# Altium PCB main.PcbDoc
Units mm, origin at the board's own origin, x right, y up, seen from the top; angles counter-clockwise.
Board outline 74.5 x 48.5 mm, 2 copper layers (Top Layer, Bottom Layer), stack 1.135 mm thick; 13 components, 9 nets, 45 pads, 0 vias.
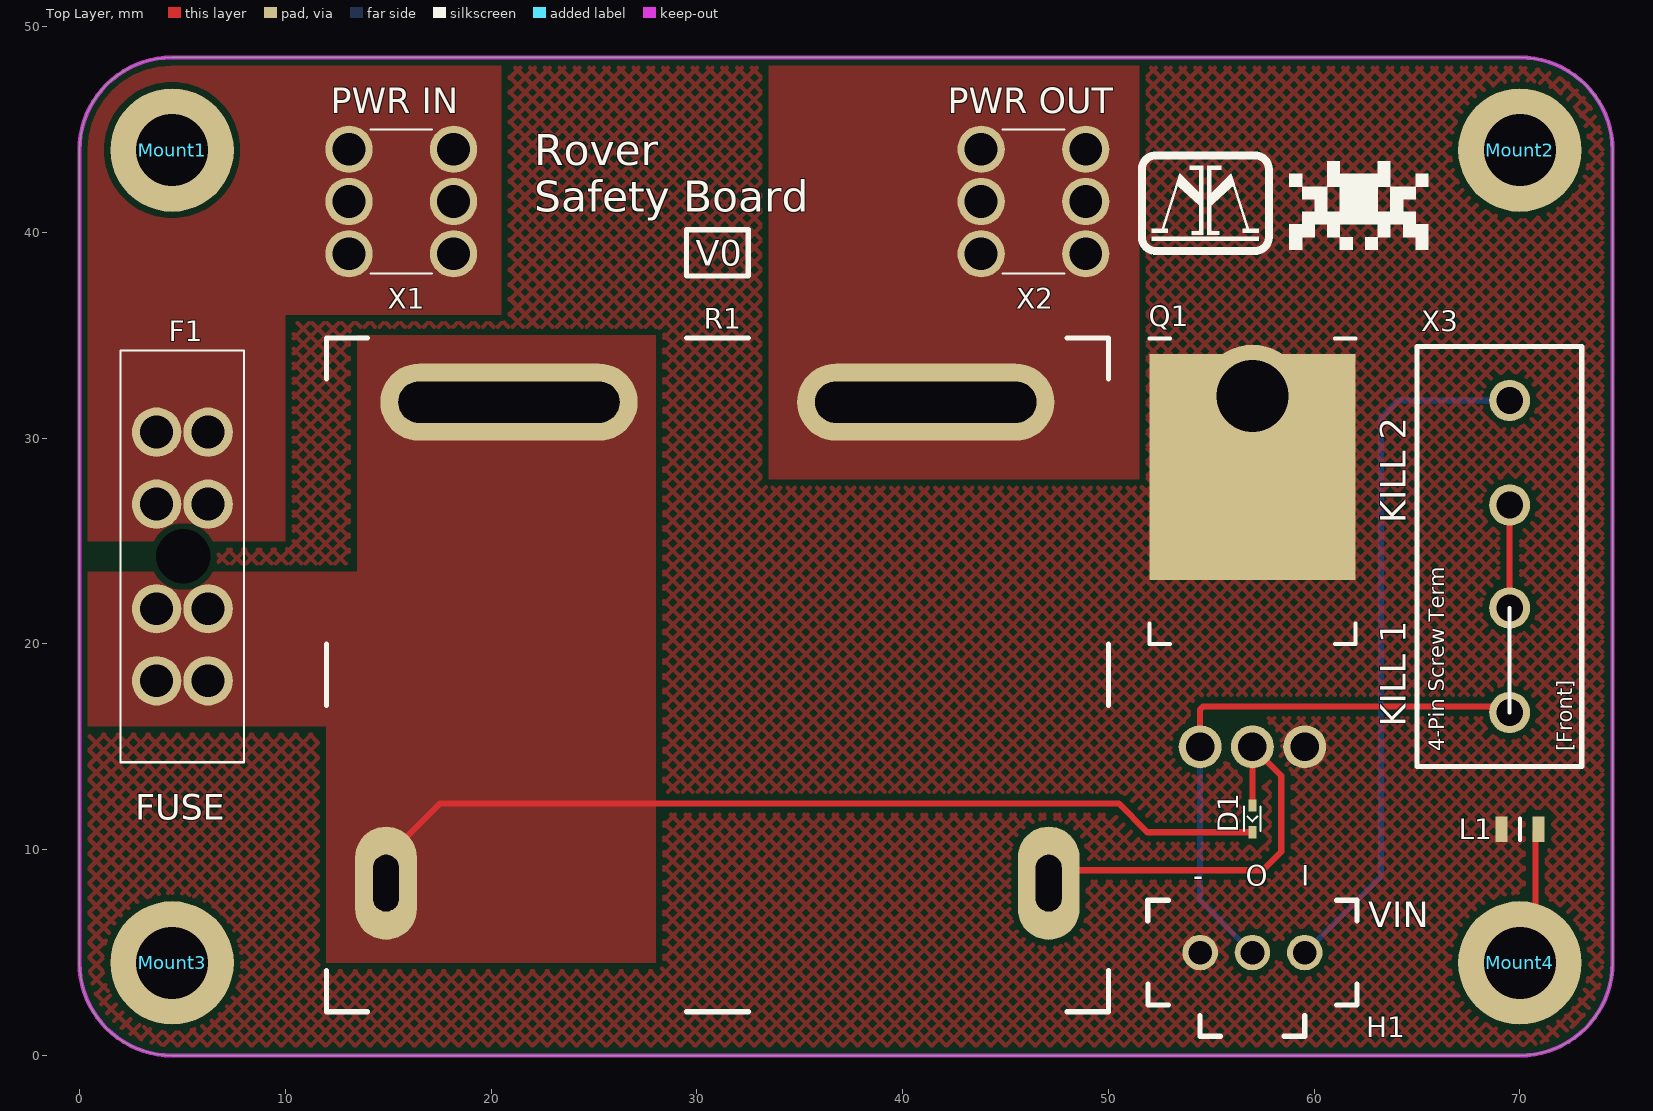
[diagram p0: Top Layer view]
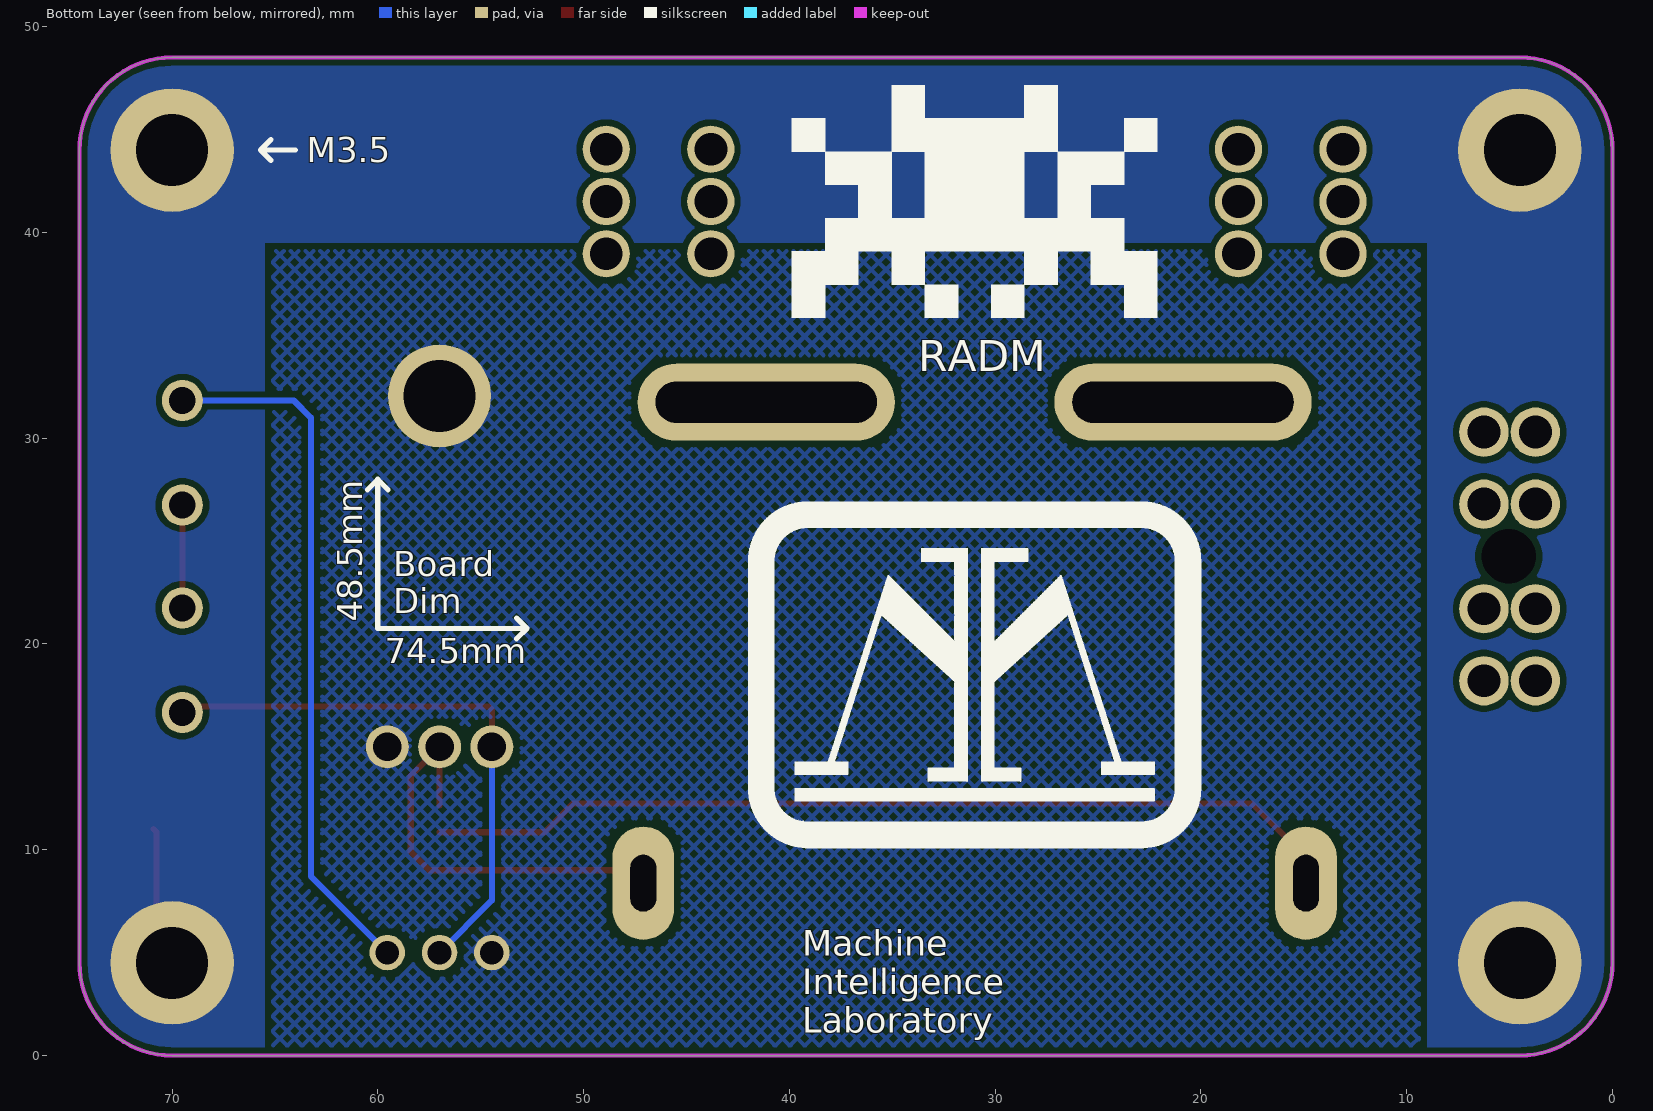
[diagram p1: Bottom Layer view, seen from below]

## Layer stack, top to bottom
Top Solder: solder mask 0.0102, Solder Resist, Dk 3.8
Top Layer: signal copper 0.035
Dielectric 1: dielectric 1.065, FR-4, Dk 4.8
Bottom Layer: signal copper 0.035
Bottom Solder: solder mask 0.0102, Solder Resist, Dk 3.8

## Board outline
4.5,0 cw(c4.5,4.5) 0,4.5 0,44 cw(c4.5,44) 4.5,48.5 70,48.5 cw(c70,44) 74.5,44 74.5,4.5 cw(c70,4.5) 70,0

## Design rules (kind name [scope] priority, off if disabled: settings)
BoardOutlineClearance [All] p1: gap=0.2 ignorepadtopadclearanceinfootprint=FALSE
Clearance "inPolygon Clearance" [InPolygon] p1: gap=0.3 ignorepadtopadclearanceinfootprint=TRUE // this rule ensures that every net within a polygon of a different net has a set clearance from the poly
Clearance "Different Diff Pair" [All] p2: gap=0.2 ignorepadtopadclearanceinfootprint=TRUE
Clearance "Same Diff Pair" [All] p3: gap=0.1 ignorepadtopadclearanceinfootprint=TRUE
Clearance "Different Nets" [not InAnyDifferentialPair] p4: gap=0.3 ignorepadtopadclearanceinfootprint=TRUE except(0.1: Arc-SMDPad Arc-THPad Arc-Via Arc-Text Track-SMDPad Track-THPad Track-Via Track-Text SMDPad-Text THPad-Text Via-Text Fill-Text Poly-Text Region-Text Text-Text; 0.12: Arc-Arc Arc-Track Track-Track; 0.15: SMDPad-SMDPad SMDPad-THPad SMDPad-Via THPad-THPad THPad-Via Via-Via; 0.2: Arc-Hole Track-Hole SMDPad-Hole THPad-Hole Via-Hole Fill-Hole Poly-Hole Region-Hole Text-Hole)
Clearance "Same Net" [not InAnyDifferentialPair] p5: gap=0 ignorepadtopadclearanceinfootprint=TRUE except(0.1: THPad-Via; 0.18: Arc-Arc Arc-Track Track-Track)
ComponentClearance [All] p1: gap=0.102 collisioncheckmode=3 verticalgap=0.102 showdistances=TRUE
DiffPairsRouting "Ethernet Routing" [InDifferentialPairClass('Ethernet_Pairs')] p1: maxlimit=0.2 minlimit=0.2 mostfreqgap=0.2 toplayer_minwidth=0.25 toplayer_maxwidth=0.25 toplayer_prefwidth=0.25 bottomlayer_minwidth=0.25 bottomlayer_maxwidth=0.25 bottomlayer_prefwidth=0.25 impedanceprofiledriven=TRUE maxuncoupledlength=12.7
DiffPairsRouting "USB Routing" [InDifferentialPairClass('USB_Pairs')] p2: maxlimit=0.127 minlimit=0.127 mostfreqgap=0.127 toplayer_minwidth=0.23 toplayer_maxwidth=0.23 toplayer_prefwidth=0.23 bottomlayer_minwidth=0.23 bottomlayer_maxwidth=0.23 bottomlayer_prefwidth=0.23 impedanceprofiledriven=TRUE maxuncoupledlength=12.7
DiffPairsRouting "CAN Routing" [InDifferentialPairClass('CAN_Pairs')] p3: maxlimit=0.5 minlimit=0.5 mostfreqgap=0.5 toplayer_minwidth=0.201 toplayer_maxwidth=0.201 toplayer_prefwidth=0.201 bottomlayer_minwidth=0.201 bottomlayer_maxwidth=0.201 bottomlayer_prefwidth=0.201 impedanceprofiledriven=TRUE maxuncoupledlength=12.7
Height [All] p1: minheight=0 maxheight=1816.048 prefheight=12.7
HoleSize [All] p1: absolutevalues=TRUE maxlimit=6.3 minlimit=0.3 maxpercent=80.000 minpercent=20.000
HoleToHoleClearance [All] p1: gap=0.25 allowstackedmicrovias=FALSE
Length [All] p1: maxlimit=43.432 minlimit=0 usedelayunits=TRUE mindelay=0.000000 maxdelay=10000.000000
MatchedLengths "Diff Pair Matched Delays" [InDifferentialPairClass('Ethernet_Pairs') or InDifferentialPairClass('USB_Pairs') or InDifferentialPairClass('CAN_Pairs')] p1: tolerance=5 checknetsindiffpair=TRUE checkdiffpairvsdiffpair=FALSE checkxsignals=FALSE checkothers=FALSE usedelayunits=TRUE delaytolerance=100.000000
MinimumAnnularRing [All] p1: minimumring=0.2
MinimumSolderMaskSliver [All] p1: minsoldermaskwidth=0
PlaneClearance "Supply Net Clearance" [InNetClass('Supply_Nets')] p1: clearance=0.5
PlaneClearance "All Nets" [All] p2: clearance=0.3
PolygonConnect "Supply Nets" [InNetClass('Supply_Nets')] p1: connectstyle=Direct reliefconductorwidth=0.3 reliefentries=4 polygonreliefangle="90 Angle" airgapwidth=0.254
PolygonConnect General [All] p2: connectstyle=Relief reliefconductorwidth=0.254 reliefentries=4 polygonreliefangle="90 Angle" airgapwidth=0.254
RoutingVias [All] p1: holewidth=0.2 width=0.35 viastyle="Through Hole" minholewidth=0.15 minwidth=0.3 maxholewidth=6.3 maxwidth=6.55
SilkToSilkClearance [All] p1: silktosilkclearance=0
SilkToSolderMaskClearance [All] p1: minsilkscreentomaskgap=0 clearancetoexposedcopper=TRUE
SolderMaskExpansion [All] p1: expansion=0.075 istentingtop=FALSE
SupplyNets "Schematic Supply Nets_3" [InNet('GND')] p1: voltage=0.000
SupplyNets "Schematic Supply Nets_1" [InNet('Earth')] p2: voltage=0.000
UnRoutedNet [All] p1: checkbadconnections=TRUE
Width [All] p1: maxlimit=100 minlimit=0.1 preferedwidth=0.3
Width "nRF Width" [InNetClass('nRF Signal')] p2: maxlimit=0.379 minlimit=0.379 preferedwidth=0.379 minimp=50.000000 maximp=50.000000 favimp=50.000000 checkconnectedcopper=TRUE
20 further rules are at their usual default settings.

## Classes and differential pairs
net class Supply_Nets: Earth GND NetD1_1 NetF1_1 NetR1_4
component class Relay: D1 F1 H1 Q1 R1 X1 X2 X3
component class Overview: L1 Mount1 Mount2 Mount3 Mount4

## Components (designator, comment, footprint, x,y, rotation, side; value= is the part's Value field where it differs from the comment)
D1 "Rectifier" "[Diode] SMD SOD-523" 57,11.5 r270 top
F1 "Thru-Hole" "[Fuse] Blade (2)" 5,24.25 r270 top
H1 "1x3 Male" "[Header] Shrouded 1x3 Male" 57,5 r180 top
L1 "742792040" "[Ferrite] SMD Bead 0805 (2)" 70,11 r180 top
Mount1 "M3 Mount Hole" "[Mount] M3 Mount Hole"#1 4.826,43.307 r0 top
Mount2 "M3 Mount Hole" "[Mount] M3 Mount Hole"#2 70,44 r90 top
Mount3 "M3 Mount Hole" "[Mount] M3 Mount Hole"#3 4.5,6.477 r90 top
Mount4 "M3 Mount Hole" "[Mount] M3 Mount Hole"#4 64.079,3.7 r90 top
Q1 "[FET] NMOS IRF610PBF" "[FET] NMOS IRF610PBF" 57,15 r0 top
R1 "AZSR190-1A-24D" "[Relay] AZSR190-1A-24D" 31,18.5 r0 top
X1 "7461057" "[Port] Shank Connector (100A)" 15.64,41.5 r0 top
X2 "7461057" "[Port] Shank Connector (100A)" 46.36,41.5 r0 top
X3 "4pin Screw Terminal" "[Screw Terminal] 4pin 5mm" 69.5,24.25 r90 top

## Footprints (in the part's own frame and the unit in brackets; to place one, negate y for a bottom-side part, rotate by r counter-clockwise, add the part's x,y. Pads: shape width x height; smd on the part's side, far side on the other; paste and mask are expansions set on the pad)
"[Diode] SMD SOD-523" [mm]
  rect 0.6x0.4 smd: 1(0.65,0) 2(-0.65,0)
  silkscreen extent -0.6,-0.4 0.6,0.4, body extent -0.8,-0.4 0.8,0.4, height 0.63
"[Ferrite] SMD Bead 0805 (2)" [mm] "742792040"
  rect 0.6x1.25 smd: 1(-0.9,0) 2(0.9,0)
  silkscreen extent 0,-0.53 0,0.53, body extent -1,-0.6 1,0.6, height 1.1
"[FET] NMOS IRF610PBF" [mm]
  round 2.085 hole 1.39: D(0,0) G(-2.54,0) S(2.54,0)
  rect 10.02x11 smd: X(0,13.6)
  round 5 hole 3.5: X(0,17.05)
  silkscreen extent -5.01,5 5.01,19.85, body extent -5.01,-0.25 5.01,20, height 4.51
"[Fuse] Blade (2)" [mm]
  round 2.4 hole 1.6: 1(-6.04,-1.25) 1(-6.04,1.25) 1(-2.54,1.25) 1(-2.54,-1.25) 2(2.54,1.25) 2(2.54,-1.25) 2(6.04,-1.25) 2(6.04,1.25)
  round 1.325 hole 2.65 unplated: ""(0,0.045)
  silkscreen extent -10,-3 10,3, body extent -10,-3 10,3, height 18.03
"[Header] Shrouded 1x3 Male" [mm] "070543-0037 / Mates with 005057-9403"
  round 1.725 hole 1.15: 1(-2.54,0) 2(0,0) 3(2.54,0)
  silkscreen extent -5.08,-2.54 5.09,4.06, body extent -5.08,-2.54 5.08,4.06, height 11.67
"[Mount] M3 Mount Hole"#1 [mm] "Place at least 4.5mm from board edge. Plated."
  round 6 hole 3.5: 1(-0.326,0.693)
"[Mount] M3 Mount Hole"#2 [mm] "Place at least 4.5mm from board edge. Plated."
  round 6 hole 3.5: 1(0,0)
"[Mount] M3 Mount Hole"#3 [mm] "Place at least 4.5mm from board edge. Plated."
  round 6 hole 3.5: 1(-1.977,0)
"[Mount] M3 Mount Hole"#4 [mm] "Place at least 4.5mm from board edge. Plated."
  round 6 hole 3.5: 1(0.8,-5.921)
"[Port] Shank Connector (100A)" [mm]
  round 2.3 hole 1.6: 1(-2.54,-2.54) 1(-2.54,0) 1(-2.54,2.54) 1(2.54,-2.54) 1(2.54,0) 1(2.54,2.54)
  silkscreen extent -1.5,-3.5 1.5,3.5, body extent -3.5,-3.5 3.5,3.5, height 6
"[Relay] AZSR190-1A-24D" [mm] "AZSR190-1A-24D"
  oval 3x5.5 hole 1.25 slot 2.75 at 90 deg: 1(-16.1,-10.125) 2(16.1,-10.125)
  oval 12.5x3.75 hole 2 slot 10.75 at 0 deg: 3(-10.125,13.25) 4(10.125,13.25)
  silkscreen extent -19,-16.38 19,16.38, body extent -19,-16.38 19,16.38, height 40
"[Screw Terminal] 4pin 5mm" [mm]
  round 2 hole 1.3: 1(-7.58,0) 2(-2.5,0) 3(2.5,0) 4(7.58,0)
  silkscreen extent -10.2,-3.5 10.2,4.5, body extent -10.53,-3.5 10.09,4.1, height 9.99

## Part data
D1: library part "[Diode] SMD Rectifier", "Generic", Size Package=SOD-523, Supplier Part Number 1=1514-CMOD2004TRPBFREECT-ND, Supplier 1=DigiKey
F1: library part "[Fuse] Thru-Hole Blade", Capacity=20A
H1: library part "[Header] Shrouded 1x3 Male", "070543-0037 / Mates with 005057-9403", Supplier Part Number 1=WM4825-ND, Supplier 1=DigiKey, Supplier 2=DigiKey, Supplier Part Number 2=WM2901-ND
L1: library part "[Ferrite] SMD Ferrite Bead (2)", Supplier Part Number 1=732-1620-1-ND, Supplier 1=DigiKey
Mount1 Mount2 Mount3 Mount4: library part "[Mount] M3 Mount Hole", "Place at least 4.5mm from board edge. Plated."
Q1: "N-Channel 200 V 3.3A (Tc) 36W (Tc) Through Hole TO-220AB", Supplier Part Number 1=IRF610PBF-ND, Supplier 1=DigiKey
R1: library part "[Relay] AZSR190-1A-24D", Supplier Part Number 1=3385-AZSR190-1A-24D-ND, Supplier 1=DigiKey
X1 X2: library part "[Port] Shank Connector (100A)", "7461057, internal thread", Supplier Part Number 1=732-7461057-ND, Supplier 1=DigiKey
X3: library part "[Screw Terminal] 4pin", Supplier Part Number 1=102-6147-ND, Supplier 1=DigiKey

## Nets (pads, with @x,y where several pads share a name; then routed paths per layer and width w, separated by ;. In a path a pad name is that pad's centre, name@x,y a point inside that pad or via, vN(x,y) a via of type N, cw(c..) or ccw(c..) an arc to the next point about the centre after c; other vN are vias at no path point)
Earth: L1.1 Mount1.1 Mount2.1 Mount3.1 Mount4.1 | length 6.9
  Top Layer w0.3: Mount4.1 70.75,5.25 70.75,10.85 L1.1
GND: H1.3 L1.2 Q1.S Q1.X
NetD1_1: D1.1 F1.2 R1.1 R1.3 | length 45
  Top Layer w0.3: R1.1 14.9,9.625 17.525,12.25 50.5,12.25 51.9,10.85 D1.1
NetD1_2: D1.2 Q1.D R1.2 | length 20.5
  Top Layer w0.3: R1.2 47.725,9 57.5,9 58.405,9.905 58.405,13.595 Q1.D 57,12.845 D1.2
NetF1_1: F1.1 X1.1
NetR1_4: R1.4 X2.1
NetX3_2: X3.2 X3.3 | length 5
  Top Layer w0.3: X3.2 X3.3
"Relay Control IN": H1.1 X3.4 | length 34.1
  Bottom Layer w0.3: H1.1 63.25,8.71 63.25,31 64.08,31.83 X3.4
"Relay Control OUT": H1.2 Q1.G X3.1 | length 28.1
  Top Layer w0.3: Q1.G 54.46,16.819 54.601,16.96 69.21,16.96 X3.1
  Bottom Layer w0.3: Q1.G 54.46,7.54 H1.2
pads on no net: F1.

## Polygon pours and split planes (outlines as drawn)
GND on Top Layer "Top GND Poly" (hatched 45Degree grid 0.508 track 0.203, remove dead copper, pour order 5): 0,0 0,48.5 74.5,48.5 74.5,0
NetR1_4 on Top Layer "NONET_L01_P-001" (solid, pour order 2): 33.5,48.5 51.5,48.5 51.5,28 33.5,28
NetD1_1 on Top Layer "Power IN Fused" (solid, remove dead copper, pour order 1): 0,23.5 13.5,23.5 13.5,35 28,35 28,4.5 12,4.5 12,16 0,16
NetF1_1 on Top Layer "Power IN Unfused" (solid, remove dead copper, pour order 0): 0,25 10,25 10,36 20.5,36 20.5,48.5 0,48.5
GND on Bottom Layer "Bottom GND Poly" (hatched 45Degree grid 0.508 track 0.203, remove dead copper, pour order 4): 9,0.408 9,39.5 65.5,39.5 65.5,0.408
Earth on Bottom Layer "Earth Poly" (solid, remove dead copper, pour order 3): 0,0 9,0 9,39.5 65.5,39.5 65.5,0 74.5,0 74.5,48.5 0,48.5

## Keep-outs
Keep-Out Layer:
  the board outline again, w0.2

## Silkscreen, mask and mechanical layers (free items; w line width, h text height)
Top Overlay:
  drawing of 14 lines, arcs and shapes, not listed
  text "PWR IN" at 12.204,45.8 h1.25
  text "PWR OUT" at 42.195,45.8 h1.25
  text "Rover / Safety Board" at 22.103,41 h1.5
  text "V0" at 29.959,38.375 h1.25
  text "KILL 2" at 64.45,25.854 h1.25 r90
  text "KILL 1" at 64.45,15.982 h1.25 r90
  text "FUSE" at 2.709,11.45 h1.25
  text "-" at 54.127,8.25 h1
  text "O" at 56.667,8.25 h1
  text "I" at 59.373,8.25 h1
  text "VIN" at 62.635,6.24 h1.25
Bottom Overlay:
  drawing of 18 lines, arcs and shapes, not listed
  text "M3.5" at 63.45,43.4 h1.2
  text "RADM" at 33.749,33.25 h1.5
  text "Board" at 59.25,23.3 h1.2
  text "Dim" at 59.25,21.5 h1.2
  text "48.5mm" at 60.75,21.076 h1.2 r270
  text "74.5mm" at 59.674,19.05 h1.2
  text "Machine / Intelligence / Laboratory" at 39.372,1.101 h1.25

## Text inside footprints (layer, text, board x,y; h text height)
X3: Top Overlay "4-Pin Screw Term" at 66.319,14.788 h0.75 r90; Top Overlay "[Front]" at 72.542,14.788 h0.75 r90